# Altium PCB LM-003.PcbDoc (part 2 of 2)
Units mm, origin at the board's own origin, x right, y up, seen from the top; angles counter-clockwise.
Board outline 67.01 x 194 mm, 6 copper layers (Top Layer, +5V, Mid-Layer 1, +3.3V, Mid-Layer 2, Bottom Layer), stack 1.23 mm thick; 63 components, 97 nets, 377 pads, 45 vias.
Unrouted connection lines stored in the file: 19.
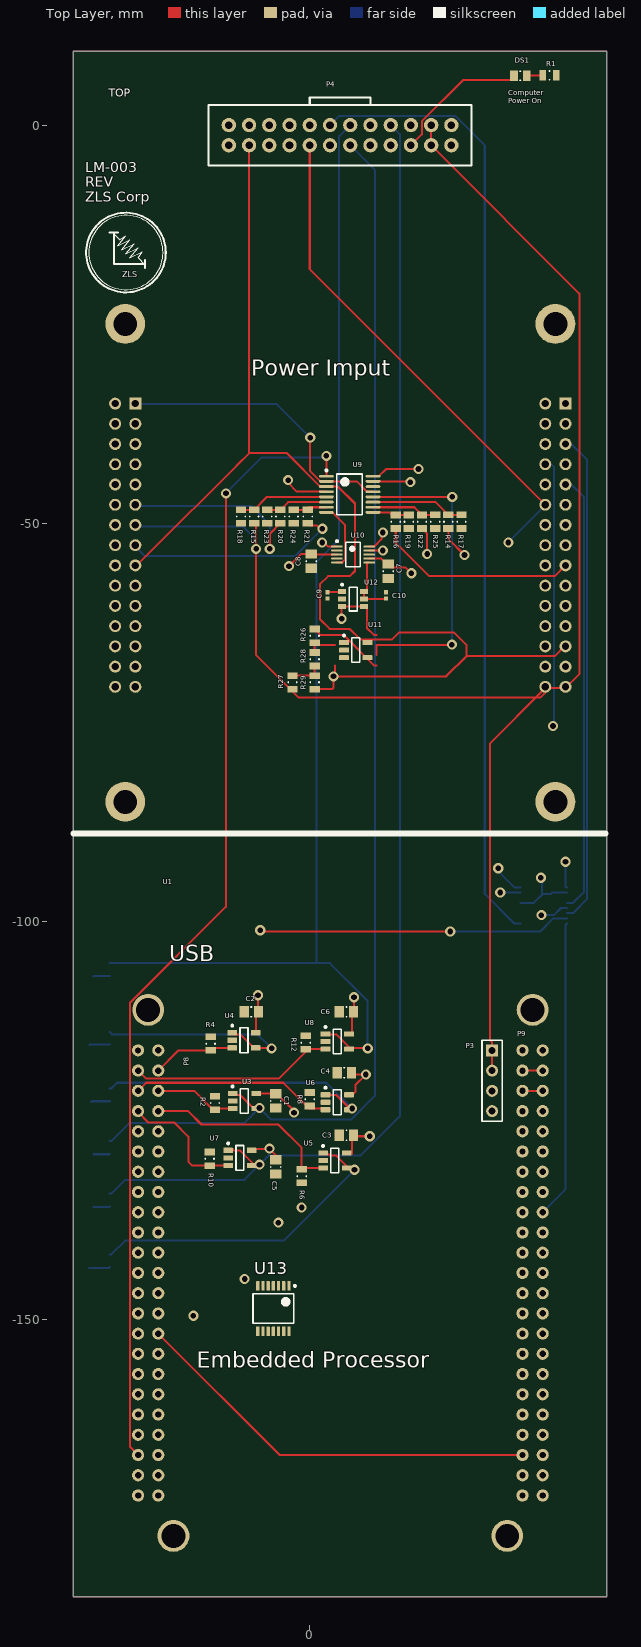
[diagram p0: Top Layer view]

## Via types
v1: diameter 1.27, hole 0.711, Top Layer to Bottom Layer, 45 vias

## Nets (pads, with @x,y where several pads share a name; then routed paths per layer and width w, separated by ;. In a path a pad name is that pad's centre, name@x,y a point inside that pad or via, vN(x,y) a via of type N, cw(c..) or ccw(c..) an arc to the next point about the centre after c; other vN are vias at no path point) (continued)
SPI0_MISO: (continued)
  Top Layer w0.254: P4.9 0,-18.096 29.364,-47.461 P2.12@29.94,-47.461 ; v1(1.559,-52.416) 1.834,-52.416 2.339,-52.921 3.414,-52.921 U10.1
  Mid-Layer 1 w0.254: v1(1.559,-52.416) v1(24.927,-52.416)
  Mid-Layer 2 w0.254: U1.9-21 36.428,-134.387 36.428,-53.104 32.526,-49.202 32.226,-49.202 30.69,-47.666 P2.12@30.31,-47.666
  Bottom Layer w0.254: v1(24.927,-52.416) 24.927,-52.363 29.623,-47.666 P2.12@30.31,-47.666
SPI0_MOSI: P2.10 U1.9-18 | length 96.4
  Mid-Layer 2 w0.254: U1.9-18 25.689,-135.474 25.689,-130.989 26.792,-129.887 27.125,-129.887 28.229,-128.783 28.229,-128.449 29.332,-127.346 29.666,-127.346 31.023,-125.989 31.023,-93.937 28.046,-90.96 28.046,-46.65 P2.10 P2.10@29.734,-45.126
SPI0_SCLK: P2.14 P4.10 U1.9-22 U10.10 | length 182.5
  Top Layer w0.254: U10.10 8.062,-52.923 8.985,-52 8.985,-51.34 v1(9.179,-51.146)
  Mid-Layer 1 w0.254: P4.10 1.386,-1.386 1.386,-22.971 23.657,-45.242 23.657,-48.97 ; v1(9.179,-51.146) 11.355,-48.97 23.657,-48.97 ; P2.14@29.57,-50.37 29.406,-50.206 24.894,-50.206 23.657,-48.97
  Mid-Layer 2 w0.254: U1.9-22 28.229,-140.046 29.666,-140.046 35.666,-134.046 35.666,-54.13 33.278,-51.742 32.226,-51.742 30.69,-50.206 P2.14@30.31,-50.206
SPI0_SYS_VOLTAGE_CS0: U2.5 U10.9 | length 61.4
  Top Layer w0.254: U10.9 v1(9.179,-53.423)
  Mid-Layer 1 w0.254: v1(9.179,-53.423) 12.783,-53.423 26.416,-67.056 26.416,-96.52 v1(29.083,-99.187)
  Bottom Layer w0.254: v1(29.083,-99.187) 30.655,-99.187 31.546,-98.296 U2.5
SPI1_CS0: U1.9-28
SPI1_MISO: U1.9-29
SPI1_MOSI: U1.9-30
SPI1_SCLK: U1.9-31
Sys_Pwr_Enable: P1.14 U1.8-22 | length 93.7
  Mid-Layer 2 w0.254: P1.14@-24.96,-50.206 -24.96,-50.399 -25.153,-50.399 -25.964,-51.21 -25.964,-137.161 U1.8-22
T_MUX_A0: U1.8-31 U13.10
T_MUX_A1: U1.8-32 U13.5
T_MUX_A2: U1.8-33 U13.3
T_MUX_A3: U1.8-34 U13.12
Thermistor_CS0: P4.12 U2.9 | length 121.4
  Bottom Layer w0.254: P4.12 3.694,1.154 18.258,1.154 21.968,-2.556 21.968,-96.518 25.696,-100.246 U2.9
ZH: P2.17 R16.1 | length 25.8
  Top Layer w0.254: R16.1 10.795,-52.451 14.986,-56.642 30.754,-56.642 P2.17 P2.17@32.47,-55.286
pads on no net: P1.2 P1.4 P1.6 P1.7 P1.9 P1.12 P1.16 P1.19 P1.20 P1.23 P1.25 P1.29 P1.30 P2.3 P2.6 P2.7 P2.11 P2.13 P2.15 P2.16 P2.18 P4.4 P4.5 U1. U1.8-20 U1.8-21 U1.8-23 U1.8-24 U1.8-28 U1.8-45 U1.8-46 U1.9-7 U1.9-8 U1.9-10 U1.9-12 U1.9-16 U1.9-19 U1.9-20 U1.9-23 U1.9-25 U1.9-27 U1.9-32 U1.9-33 U1.9-34 U1.9-35 U1.9-36 U1.9-37 U1.9-38 U1.9-39 U1.9-40 U1.9-41 U2.10 U2.11 U2.12
copper on no net: | length 9.7
  Top Layer w0.254: 0.608,-63.285 1.334,-64.011 3.149,-64.011 4.239,-64.011 8.049,-67.821 8.399,-67.821

## Polygon pours and split planes (outlines as drawn)
GND on Top Layer "GND" (solid, shelved, pour order 95): -29.695,-184.767 37.31,-184.767 37.31,9.268 -29.695,9.268
GND on Bottom Layer "GND" (solid, shelved, pour order 79): -29.695,-184.767 37.31,-184.767 37.31,9.234 -29.695,9.234
+5 on +5V (split plane): 36.8,-184.256 -29.185,-184.256 -29.185,8.724 36.8,8.724
+3.3 on +3.3V (split plane): 36.8,-184.256 -29.185,-184.256 -29.185,8.724 36.8,8.724

## Silkscreen, mask and mechanical layers (free items; w line width, h text height)
Top Overlay:
  circle w0.254: c-23.079,-16.005 r5
  circle w0.1: c-23.079,-16.005 r4.663
  lines w0.025: -29.545,-88.766 -25.69,-88.766
  lines w0.1: -24.603,-13.643 -23.841,-14.405 -23.079,-13.897 -24.095,-15.167 -22.571,-14.405 -23.587,-15.675 -22.063,-14.913 -23.079,-16.183 -21.555,-15.421 -22.571,-16.691 -21.047,-15.929 -21.555,-16.691 -20.793,-17.453
  lines w0.254: -25.111,-13.516 -24.095,-13.516 ; -24.603,-13.643 -24.603,-17.453 -20.793,-17.453 ; -20.666,-17.961 -20.666,-16.945 ; 0,2.54 0,3.475 3.996,3.475 7.527,3.475 ; 7.62,2.54 7.62,3.475
  lines w0.762: -29.673,-88.966 37.104,-88.966
  text "TOP" at -25.263,3.534 h1
  text "Computer  / Power On" at 24.927,2.754 h0.65
  text "LM-003" at -28.159,-5.934 h1.27
  text "REV" at -28.159,-7.75 h1.27
  text "ZLS Corp" at -28.159,-9.655 h1.27
  text "ZLS" at -23.516,-19.09 h0.75
  text "Power Imput" at -7.361,-31.466 h2
  text "USB" at -17.66,-104.966 h2
  text "Embedded Processor" at -14.16,-156.033 h2
Bottom Overlay:
  lines w0.254: -29.56,-88.776 -25.705,-88.776 ; 33.275,-88.766 37.13,-88.766
  lines w0.762: -29.683,-88.966 36.357,-88.966
  text "Feedback" at 11.34,-36.966 h2
  text "CTH" at -29.429,-107.026 h0.65 r270
  text "P8" at -17.66,-114.194 h0.65
  text "P9" at 30.353,-114.457 h0.65
  text "AH" at -29.429,-115.408 h0.65 r270
  text "2" at 24.8,-116.424 h0.65
  text "1" at -16.729,-116.462 h0.65
  text "1" at 32.494,-116.466 h0.65
  text "GBH" at -29.429,-122.52 h0.65 r270
  text "MH" at -29.429,-129.124 h0.65 r270
  text "BH1" at -29.429,-136.236 h0.65 r270
  text "20" at 25.181,-139.322 h0.65
  text "19" at 32.547,-139.322 h0.65
  text "19" at -16.221,-139.576 h0.65
  text "BH2" at -29.429,-143.856 h0.65 r270
  text "Motor Control / Bluetooth" at 16.315,-147.966 h2
  text "40" at 25.181,-164.659 h0.65
Mechanical 13:
  text "Stand-off for bottom: / HEX STANDOFF #4-40 SS 7/16\" / P/N: 4504-440-SS" at -30.78,26.54 h0.65
  text "Stand-off for top:  / HEX STANDOFF #4-40 SS 3/8\" / P/N: 2055-440-SS-20" at 24.846,26.032 h0.65
  text "BBB Position  X: 1320 mil   Y:1600 mil" at -10.887,-186.82 h0.65
  text "Stand-off for top: / HEX STANDOFF #4-40 SS 7/16\" / P/N: 2056-440-SS" at -43.653,-192.878 h0.65
  text "Stand-off for bottom: / HEX STANDOFF #4-40 SS 7/16\" / P/N: 4504-440-SS" at -43.907,-198.974 h0.65

## Dimensions
-21.555,-172.05 to 29.245,-172.05 on Mechanical 13
37.31,9.238 to -29.695,9.234 on Mechanical 13
-29.695,-184.767 to -31.69,9.234 on Mechanical 13
-23.16,-24.966 to -23.16,-84.966 on Mechanical 13
30.84,-24.966 to -23.16,-24.966 on Mechanical 13
-23.16,-84.966 to -29.673,-88.966 on Mechanical 13
-29.695,9.234 to -23.16,-84.966 on Mechanical 13
-17.11,-177.13 to 24.8,-177.13 on Mechanical 13

## Text inside footprints (layer, text, board x,y; h text height)
U1: Top Overlay "P8" at -15.205,-118.075 h0.65 r90; Top Overlay "P9" at 26.035,-114.407 h0.65